# Altium PCB PCB2.PcbDoc (part 1 of 5)
Units mil, origin at the board's own origin, x right, y up, seen from the top; angles counter-clockwise.
Board outline 6000 x 4000 mil, 2 copper layers (Top Layer, Bottom Layer); 109 components, 117 nets, 490 pads, 96 vias.
Unrouted connection lines stored in the file: 3.
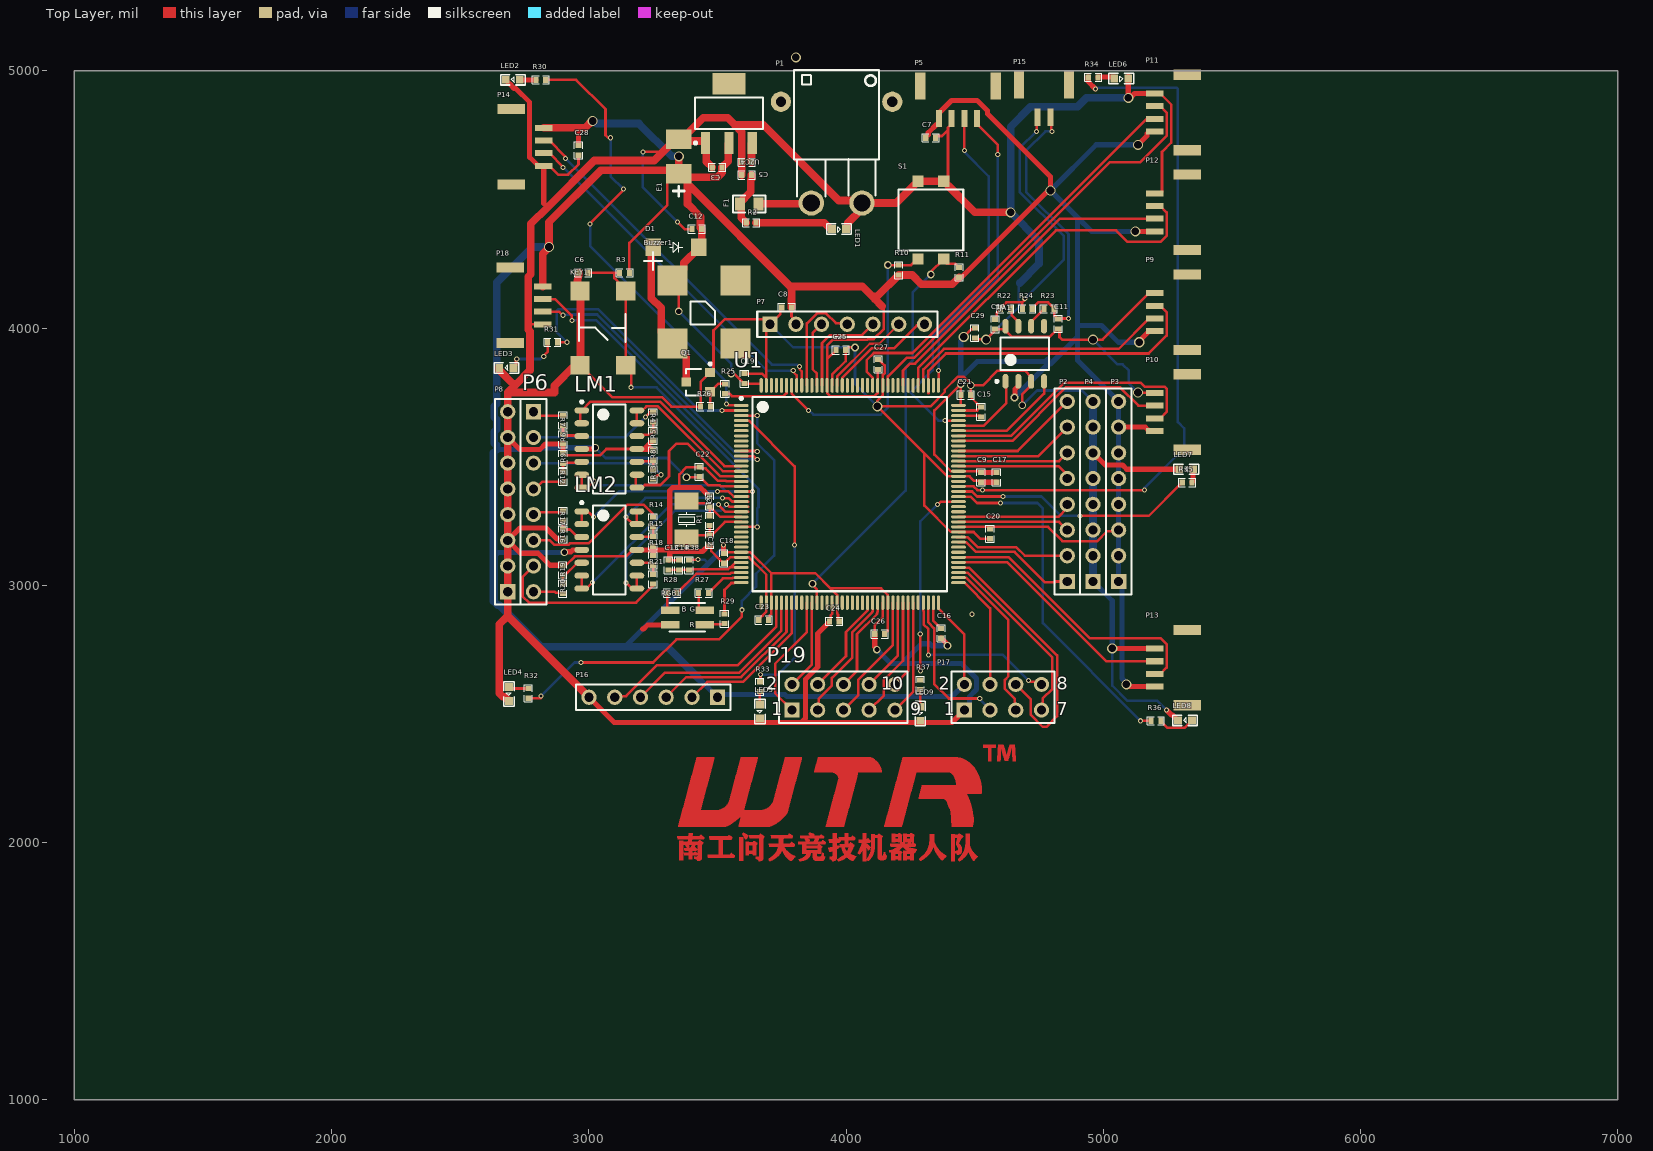
[diagram p0: Top Layer view]
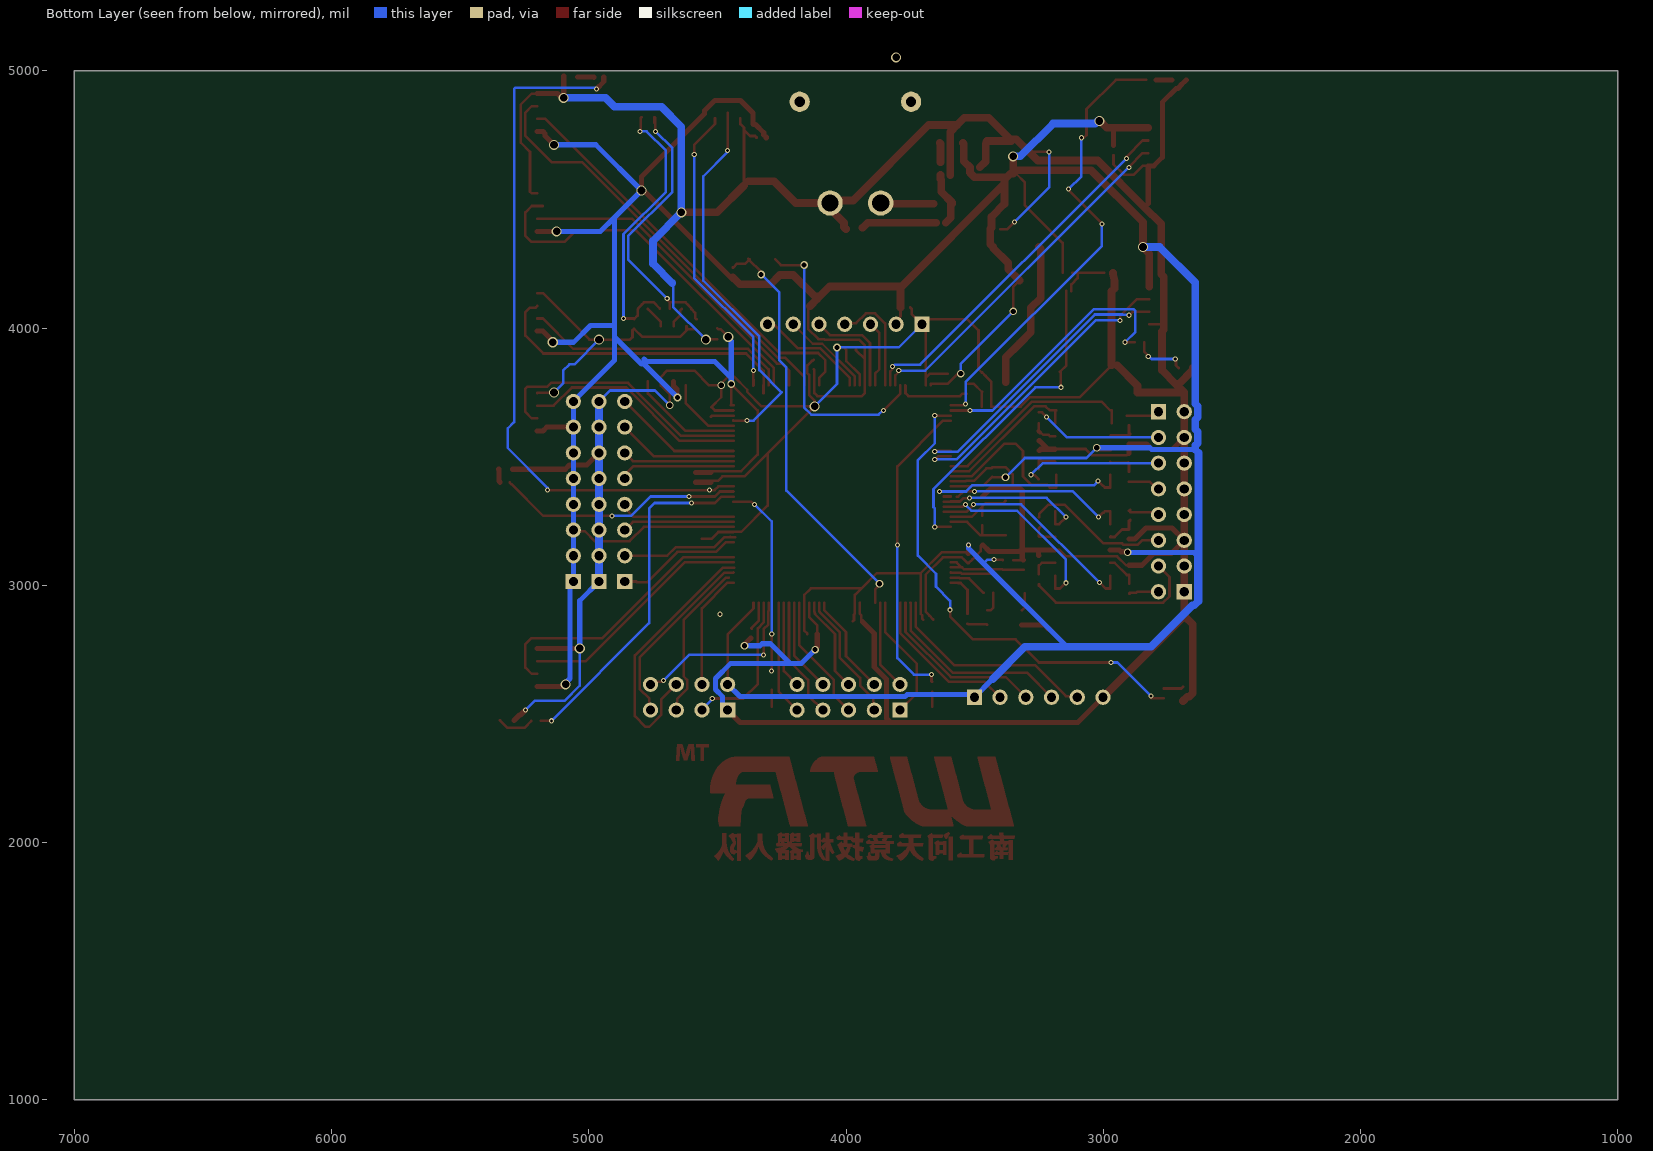
[diagram p1: Bottom Layer view, seen from below]

## Layer stack, top to bottom
Top Solder: solder mask 0.4, Solder Resist, Dk 3.5
Top Layer: signal copper 1.4
Dielectric 1: dielectric 12.6, FR-4, Dk 4.8
Bottom Layer: signal copper 1.4
Bottom Solder: solder mask 0.4, Solder Resist, Dk 3.5

## Board outline
1000,1000 7000,1000 7000,5000 1000,5000

## Design rules (kind name [scope] priority, off if disabled: settings)
Clearance [All] p1: gap=8 ignorepadtopadclearanceinfootprint=TRUE except(0: Arc-Hole Track-Hole SMDPad-Hole THPad-Hole Via-Hole Fill-Hole Poly-Hole Region-Hole Text-Hole)
ComponentClearance [All] p1: gap=0 collisioncheckmode=3 verticalgap=0 showdistances=FALSE
MinimumSolderMaskSliver [All] p1: minsoldermaskwidth=0
PolygonConnect [All] p1: connectstyle=Relief reliefconductorwidth=10 reliefentries=4 polygonreliefangle="90 Angle" airgapwidth=10
RoutingVias [All] p1: holewidth=11.81 width=19.68 viastyle="Through Hole" minholewidth=11.81 minwidth=11.81 maxholewidth=39.37 maxwidth=39.37
SilkToSilkClearance [All] p1: silktosilkclearance=0
SilkToSolderMaskClearance [IsPad] p1: minsilkscreentomaskgap=0 clearancetoexposedcopper=TRUE
SolderMaskExpansion [All] p1: expansion=4
Width [All] p1: maxlimit=100 minlimit=5 preferedwidth=10
26 further rules are at their usual default settings.

## Components (designator, comment, footprint, x,y, rotation, side; value= is the part's Value field where it differs from the comment)
Buzzer1 "Buzzer" BUZZER 3615.3,4230 r180 top
C1 "22PF" 0402 3470,3326.5 r90 top
C2 "22PF" 0402 3470,3176.5 r270 top
C3 "0.1uf" 0402 3499,4625 r180 top
C4 "0.1uf" 0402 3614,4645 r180 top
C5 "10uf" 0402 3614,4595 r180 top
C6 "1uf" 0402 2978,4215 r180 top
C7 "0.1uf" 0402 4329,4740 r180 top
C8 "0.1uf" 0402 3769,4080 r0 top
C9 "0.1uf" 0402 4525,3420 r270 top
C10 "30pf" 0402 4580,4015.4 r90 top
C11 "30pf" 0402 4825,4016.2 r90 top
C12 "10uf" 0402 3420,4385.06 r0 top
C13 "10uf" 0402 3310,3079 r270 top
C14 "104" 0402 3350,3079 r270 top
C15 "225" 0402 4525,3674 r270 top
C16 "225" 0402 4369.77,2813.28 r90 top
C17 "106" 0402 4585,3420 r90 top
C18 "104" 0402 3525,3105 r90 top
C19 "104" 0402 3605,3804 r270 top
C20 "104" 0402 4560,3200 r90 top
C21 "104" 0402 4466,3740 r180 top
C22 "104" 0402 3430,3440.9 r270 top
C23 "104" 0402 3680,2865.7 r0 top
C24 "104" 0402 3955,2860 r0 top
C25 "104" 0402 3980,3915.24 r180 top
C26 "104" 0402 4131,2810.58 r0 top
C27 "104" 0402 4125,3858.61 r270 top
C28 "104" 0402 2960,4691 r90 top
C29 "104" 0402 4500.89,3981 r90 top
D1 "DIODE" DIODE 3427.17,4315 r180 top
E1 "100uF/10V" 3528 3350,4600 r90 top
F1 "Fuse" 0805 3623.85,4483.15 r0 top
KEY1 "Key" 6*6*5轻触开关 3055,4000 r90 top
LED1 "green" 0603 3972.5,4385.06 r0 top
LED2 "red" 0603 2705,4965 r180 top
LED3 "red" 0603 2680,3845 r180 top
LED4 "red" 0603 2690,2578 r270 top
LED5 "red" 0603 3665.67,2510 r270 top
LED6 "green" 0603 5070,4970 r0 top
LED7 "green" 0603 5323,3451.06 r180 top
LED8 "green" 0603 5317.98,2475 r180 top
LED9 "green" 0603 4288.74,2501.48 r270 top
LM1 "LM324" LM324 3080,3530 r0 top
LM2 "LM324" LM324 3080,3137.81 r0 top
P1 "Header 2" XT30-PW-M 3963.46,4683.15 r0 top
P2 "Header 8" HDR1X8 4860,3015 r90 top
P3 "Header 8" HDR1X8 5060,3015 r90 top
P4 "Header 8" HDR1X8 4960,3015 r90 top
P5 "Header 4" GH1.25_4P 4435.39,4894.72 r180 top
P6 "Header 8" HDR1X8 2785,3675 r270 top
P7 "Header 7" HDR1X7 3705,4015 r0 top
P8 "Header 8" HDR1X8 2685,2975 r90 top
P9 "Header 4" GH1.25_4P 5279.72,4061.89 r90 top
P10 "Header 4" GH1.25_4P 5279.72,3673.82 r90 top
P11 "Header 4" GH1.25_4P 5279.72,4838.03 r90 top
P12 "Header 4" GH1.25_4P 5279.72,4449.96 r90 top
P13 "Header 4" GH1.25_4P 5279.72,2680.39 r90 top
P14 "Header 4" GH1.25_4P 2745.28,4704.61 r270 top
P15 "Header 2" GH1.25_2P 4867.05,5057.98 r180 top
P16 "Header 6" HDR1X6 3501,2565 r180 top
P17 "Header 4X2" HDR2X4 4460,2515 r0 top
P18 "Header 4" GH1.25_4P 2741.26,4088.35 r270 top
P19 "Header 5X2" HDR2X5 3790,2515 r0 top
Q1 "S8050" SOT-23R 3430,3790 r90 top
R1 "1M" 0402 3470.13,3251.5 r90 top
R2 "560R" 0402 3631,4410 r0 top
R3 "10K" 0402 3139,4215 r0 top
R4 "100K" 0402 3250,3654 r270 top
R5 "100K" 0402 3250,3581.06 r90 top
R6 "100K" 0402 2899.97,3568 r90 top
R7 "100K" 0402 2899.97,3641 r90 top
R8 "100K" 0402 3250,3504.87 r270 top
R9 "100K" 0402 2899.97,3493 r270 top
R10 "10K" 0402 4204.8,4225.64 r270 top
R11 "10K" 0402 4439.8,4216.64 r90 top
R12 "100K" 0402 2899.97,3421.9 r270 top
R13 "100K" 0402 3250,3432.06 r270 top
R14 "100K" 0402 3250,3246 r270 top
R15 "100K" 0402 3250,3171.16 r90 top
R16 "100K" 0402 2899.97,3199 r90 top
R17 "100K" 0402 2899.97,3270.19 r90 top
R18 "100K" 0402 3250,3097.16 r270 top
R19 "100K" 0402 2899.23,3059.16 r270 top
R20 "100K" 0402 2899.23,2987.35 r270 top
R21 "100K" 0402 3250,3024 r270 top
R22 "0R" 0402 4620,4075.2 r180 top
R23 "0R" 0402 4789,4075.2 r0 top
R24 "120R" 0402 4705,4075.2 r180 top
R25 "510R" 0402 3530,3764 r90 top
R26 "10K" 0402 3453.7,3695 r0 top
R27 "47R" 0402 3446.17,2970.55 r180 top
R28 "47R" 0402 3324,2970 r0 top
R29 "68R" 0402 3527.58,2870 r270 top
R30 "1K" 0402 2814,4965 r0 top
R31 "1K" 0402 2859,3945 r0 top
R32 "1K" 0402 2765,2580 r270 top
R33 "1K" 0402 3665,2606 r90 top
R34 "510R" 0402 4961,4975 r180 top
R35 "510R" 0402 5325.98,3400 r180 top
R36 "510R" 0402 5205,2473.5 r180 top
R37 "510R" 0402 4288.68,2613.62 r90 top
R38 "10R" 0402 3390,3079 r270 top
RGB1 "RGB" RGB_LED 3384.14,2875 r0 top
S1 "Switch" SWITCH_2P 4329.8,4420.11 r0 top
TJA1 "TJA1050" TJA1050 4695,3900.2 r90 top
U1 "STM32F407ZGT6" STM32F103ZETx 4015,3355 r0 top
U2 "AMS1117-3.3" ASM1117 3545,4835 r90 top
x1 "8MHz" 8M晶振 3380,3255.5 r270 top

## Footprints (in the part's own frame and the unit in brackets; to place one, negate y for a bottom-side part, rotate by r counter-clockwise, add the part's x,y. Pads: shape width x height; smd on the part's side, far side on the other; paste and mask are expansions set on the pad)
6*6*5轻触开关 [mm]
  rect 1.85x1.9 smd: 1(-3.675,2.25) 2(3.675,2.25) 3(-3.675,-2.25) 4(3.675,-2.25)
  silkscreen extent -1.35,-2.22 1.45,2.35
8M晶振 [mm]
  rect 1.7x2.4 smd: 1(-1.85,0) 2(1.85,0)
  silkscreen extent -0.72,-0.77 0.72,0.87, body extent -2.5,-1.6 2.5,1.6, height 0.25
0402 [mil]
  rect 20x23.62 smd: 1(-19,0) 2(19,0)
  silkscreen extent -33,-16 33,16
0603 [mil]
  rect 30x30 smd: 1(-27,0) 2(27.5,-0.06)
  silkscreen extent -48,-20 48,20
0805 [mil]
  rect 39.37x50 smd: 1(-36,0) 2(36,0)
  silkscreen extent -63,-33 64,33
3528 [mm]
  rect 1.9x2.5 smd: 1(0,0) 2(3.42,0)
  silkscreen extent -2.24,-0.56 -1.24,0.56
ASM1117 [mm] "SOT223, 4-Leads, Body 6.51x7.00mm (avg), Pitch 2.30mm, IPC Medium Density"
  rect 2.15x0.9 smd: 1(-2.93,2.3) 2(-2.93,0) 3(-2.93,-2.3)
  rect 2.15x3.25 smd: 4(2.93,0)
  silkscreen extent -3.05,-3.35 1.55,3.42, body extent -1.86,-3.35 1.86,3.35, height 1.8
BUZZER [mil]
  rect 118.11x118.11 smd: 1(290,45) 2(290,290) 3(45,290) 4(45,45)
  silkscreen extent 124,-65 400,216
DIODE [mm] "SODFL, 2-Leads, Body 3.63x5.35mm, IPC Medium Density"
  rect 1.52x1.724 smd: 1(0,0) 2(4.5,0)
  silkscreen extent 1.57,-0.5 2.86,0.52
GH1.25_2P [mm]
  rect 1x2.7 smd: 0(0,2.845) 0(4.95,2.845)
  rect 0.6x1.7 smd: 1(1.85,6.045) 2(3.1,6.045)
GH1.25_4P [mm]
  rect 1x2.7 smd: 0(-3.725,-1.175) 0(3.725,-1.175)
  rect 0.6x1.7 smd: 1(-1.875,2.025) 2(-0.625,2.025) 3(0.625,2.025) 4(1.875,2.025)
HDR1X6 [mm] "Connector; Header; 6 Position"
  rect 1.5x1.5 hole 0.9: 1(0,0)
  round 1.5 hole 0.9: 2(2.54,0) 3(5.08,0) 4(7.62,0) 5(10.16,0) 6(12.7,0)
  silkscreen extent -1.27,-1.27 13.97,1.27
HDR1X7 [mm] "Connector; Header; 7 Position"
  rect 1.5x1.5 hole 0.9: 1(0,0)
  round 1.5 hole 0.9: 2(2.54,0) 3(5.08,0) 4(7.62,0) 5(10.16,0) 6(12.7,0) 7(15.24,0)
  silkscreen extent -1.27,-1.27 16.51,1.27
HDR1X8 [mm] "Connector; Header; 8 Position"
  rect 1.5x1.5 hole 0.9: 1(0,0)
  round 1.5 hole 0.9: 2(2.54,0) 3(5.08,0) 4(7.62,0) 5(10.16,0) 6(12.7,0) 7(15.24,0) 8(17.78,0)
  silkscreen extent -1.27,-1.27 19.05,1.27
HDR2X4 [mm] "Connector; Header; 4x2 Position"
  rect 1.5x1.5 hole 0.9: 1(0,0)
  round 1.5 hole 0.9: 2(0,2.54) 3(2.54,0) 4(2.54,2.54) 5(5.08,0) 6(5.08,2.54) 7(7.62,0) 8(7.62,2.54)
  silkscreen extent -1.27,-1.27 8.89,3.81
HDR2X5 [mm] "Connector; Header; 5x2 Position"
  rect 1.5x1.5 hole 0.9: 1(0,0)
  round 1.5 hole 0.9: 2(0,2.54) 3(2.54,0) 4(2.54,2.54) 5(5.08,0) 6(5.08,2.54) 7(7.62,0) 8(7.62,2.54) 9(10.16,0) 10(10.16,2.54)
  silkscreen extent -1.27,-1.27 11.43,3.81
LM324 [mm] "SOIC, 14-Leads, Body 8.65x3.90mm, Pitch 1.27mm, IPC Medium Density"
  oval 1.45x0.6 smd: 1(-2.725,3.81) 2(-2.725,2.54) 3(-2.725,1.27) 4(-2.725,0) 5(-2.725,-1.27) 6(-2.725,-2.54) 7(-2.725,-3.81) 8(2.725,-3.81) 9(2.725,-2.54) 10(2.725,-1.27) 11(2.725,0) 12(2.725,1.27) 13(2.725,2.54) 14(2.725,3.81)
  silkscreen extent -2.85,-4.4 1.6,4.78, body extent -2,-4.4 2,4.4, height 1.75
RGB_LED [mm]
  rect 1.8x0.75 smd: 1(-1.7,-0.725) 2(-1.7,0.725) 3(1.7,-0.725) 4(1.7,0.725)
  silkscreen extent -1.8,-1.36 1.7,1.44
SOT-23R [mm] "SOT-23; 3 Leads; Body 3.0 x 2.5 mm, inc. leads (LxW max)"
  rect 0.9x0.95 smd: 1(0.95,-1.048) 2(-0.95,-1.048) 3(0,1.302)
  silkscreen extent -1.3,-1.19 1.93,1.3
STM32F103ZETx [mm] "TSQFP, 144-Leads, Body 20.00x20.00mm, Pitch 0.50mm, IPC Medium Density"
  oval 1.45x0.3 smd: 1(-10.725,8.75) 2(-10.725,8.25) 3(-10.725,7.75) 4(-10.725,7.25) 5(-10.725,6.75) 6(-10.725,6.25) 7(-10.725,5.75) 8(-10.725,5.25) 9(-10.725,4.75) 10(-10.725,4.25) 11(-10.725,3.75) 12(-10.725,3.25) 13(-10.725,2.75) 14(-10.725,2.25) 15(-10.725,1.75) 16(-10.725,1.25) 17(-10.725,0.75) 18(-10.725,0.25) 19(-10.725,-0.25) 20(-10.725,-0.75) 21(-10.725,-1.25) 22(-10.725,-1.75) 23(-10.725,-2.25) 24(-10.725,-2.75) 25(-10.725,-3.25) 26(-10.725,-3.75) 27(-10.725,-4.25) 28(-10.725,-4.75) 29(-10.725,-5.25) 30(-10.725,-5.75) 31(-10.725,-6.25) 32(-10.725,-6.75) 33(-10.725,-7.25) 34(-10.725,-7.75) 35(-10.725,-8.25) 36(-10.725,-8.75) 73(10.725,-8.75) 74(10.725,-8.25) 75(10.725,-7.75) 76(10.725,-7.25) 77(10.725,-6.75) 78(10.725,-6.25) 79(10.725,-5.75) 80(10.725,-5.25) 81(10.725,-4.75) 82(10.725,-4.25) 83(10.725,-3.75) 84(10.725,-3.25) 85(10.725,-2.75) 86(10.725,-2.25) 87(10.725,-1.75) 88(10.725,-1.25) 89(10.725,-0.75) 90(10.725,-0.25) 91(10.725,0.25) 92(10.725,0.75) 93(10.725,1.25) 94(10.725,1.75) 95(10.725,2.25) 96(10.725,2.75) 97(10.725,3.25) 98(10.725,3.75) 99(10.725,4.25) 100(10.725,4.75) 101(10.725,5.25) 102(10.725,5.75) 103(10.725,6.25) 104(10.725,6.75) 105(10.725,7.25) 106(10.725,7.75) 107(10.725,8.25) 108(10.725,8.75)
  oval 0.3x1.45 smd: 37(-8.75,-10.725) 38(-8.25,-10.725) 39(-7.75,-10.725) 40(-7.25,-10.725) 41(-6.75,-10.725) 42(-6.25,-10.725) 43(-5.75,-10.725) 44(-5.25,-10.725) 45(-4.75,-10.725) 46(-4.25,-10.725) 47(-3.75,-10.725) 48(-3.25,-10.725) 49(-2.75,-10.725) 50(-2.25,-10.725) 51(-1.75,-10.725) 52(-1.25,-10.725) 53(-0.75,-10.725) 54(-0.25,-10.725) 55(0.25,-10.725) 56(0.75,-10.725) 57(1.25,-10.725) 58(1.75,-10.725) 59(2.25,-10.725) 60(2.75,-10.725) 61(3.25,-10.725) 62(3.75,-10.725) 63(4.25,-10.725) 64(4.75,-10.725) 65(5.25,-10.725) 66(5.75,-10.725) 67(6.25,-10.725) 68(6.75,-10.725) 69(7.25,-10.725) 70(7.75,-10.725) 71(8.25,-10.725) 72(8.75,-10.725) 109(8.75,10.725) 110(8.25,10.725) 111(7.75,10.725) 112(7.25,10.725) 113(6.75,10.725) 114(6.25,10.725) 115(5.75,10.725) 116(5.25,10.725) 117(4.75,10.725) 118(4.25,10.725) 119(3.75,10.725) 120(3.25,10.725) 121(2.75,10.725) 122(2.25,10.725) 123(1.75,10.725) 124(1.25,10.725) 125(0.75,10.725) 126(0.25,10.725) 127(-0.25,10.725) 128(-0.75,10.725) 129(-1.25,10.725) 130(-1.75,10.725) 131(-2.25,10.725) 132(-2.75,10.725) 133(-3.25,10.725) 134(-3.75,10.725) 135(-4.25,10.725) 136(-4.75,10.725) 137(-5.25,10.725) 138(-5.75,10.725) 139(-6.25,10.725) 140(-6.75,10.725) 141(-7.25,10.725) 142(-7.75,10.725) 143(-8.25,10.725) 144(-8.75,10.725)
  silkscreen extent -10.85,-9.6 9.6,9.6, body extent -10,-10 10,10, height 1.6
SWITCH_2P [mm]
  rect 1.1x1.1 smd: 1(-1.27,3.835) 2(-1.27,-3.835) 3(1.27,3.835) 4(1.27,-3.835)
  silkscreen extent -3.2,-3.03 3.2,3.03
TJA1050 [mm] "SOIC, 8-Leads, Body 4.90x3.90mm, Pitch 1.27mm, IPC Medium Density"
  oval 1.45x0.6 smd: 1(-2.725,1.905) 2(-2.725,0.635) 3(-2.725,-0.635) 4(-2.725,-1.905) 5(2.725,-1.905) 6(2.725,-0.635) 7(2.725,0.635) 8(2.725,1.905)
  silkscreen extent -2.85,-2.4 1.6,2.88, body extent -2,-2.4 2,2.4, height 1.75
XT30-PW-M [mm]
  round 2 hole 1: 0(-5.5,5) 0(5.5,5)
  round 2.5 hole 1.7: 1(-2.5,-5) 2(2.5,-5)
  silkscreen extent -4.22,-4.34 4.19,8.13

## Part data
C1 C2 C3 C4 C5 C6 C7 C8 C9 C10 C11 C12 C13 C14 C15 C16 C17 C18 C19 C20 C21 C22 C23 C24 C25 C26 C27 C28 C29: library part C
E1: library part C-CM, "钽电容", BOM名称=贴片电解电容, 学习资源=www.ooocke.com, 版权归属=源创客
LED1 LED2 LED3 LED4 LED5 LED6 LED7 LED8 LED9: library part LED
P1 P15: "Header, 2-Pin", LatestRevisionDate=17-Jul-2002, LatestRevisionNote="Re-released for DXP Platform.", Publisher="Altium Limited"
P2 P3 P4 P6 P8: "Header, 8-Pin", LatestRevisionDate=17-Jul-2002, LatestRevisionNote="Re-released for DXP Platform.", Publisher="Altium Limited"
P5 P9 P10 P11 P12 P13 P14 P18: "Header, 4-Pin", LatestRevisionDate=17-Jul-2002, LatestRevisionNote="Re-released for DXP Platform.", Publisher="Altium Limited"
P7: "Header, 7-Pin", LatestRevisionDate=17-Jul-2002, LatestRevisionNote="Re-released for DXP Platform.", Publisher="Altium Limited"
P16: "Header, 6-Pin", LatestRevisionDate=17-Jul-2002, LatestRevisionNote="Re-released for DXP Platform.", Publisher="Altium Limited"
P17: "Header, 4-Pin, Dual row", LatestRevisionDate=17-Jul-2002, LatestRevisionNote="Re-released for DXP Platform.", Publisher="Altium Limited"
P19: "Header, 5-Pin, Dual row", LatestRevisionDate=17-Jul-2002, LatestRevisionNote="Re-released for DXP Platform.", Publisher="Altium Limited"
Q1: library part NPN, "8050/BCW846/BCW847"
R1 R2 R3 R4 R5 R6 R7 R8 R9 R10 R11 R12 R13 R14 R15 R16 R17 R18 R19 R20 R21 R22 R23 R24 R25 R26 R27 R28 R29 R30 R31 R32 R33 R34 R35 R36 R37 R38: library part R
x1: library part XTAL_8MHz

## Via types
v1: diameter 19.68, hole 11.81, Top Layer to Bottom Layer, tented both sides, 64 vias
v2: diameter 39, hole 30, Top Layer to Bottom Layer, tented both sides, 17 vias
v3: diameter 30, hole 20, Top Layer to Bottom Layer, tented both sides, 15 vias

## Nets (pads, with @x,y where several pads share a name; then routed paths per layer and width w, separated by ;. In a path a pad name is that pad's centre, name@x,y a point inside that pad or via, vN(x,y) a via of type N, cw(c..) or ccw(c..) an arc to the next point about the centre after c; other vN are vias at no path point)
ADC3_4: LM1.6 LM1.7 U1.18 | length 800.9
  Top Layer w10: LM1.6@2972.72,3430 LM1.7@2972.72,3381.14 ; LM1.7@2988.31,3381.14 LM1.7@2972.72,3381.14 ; v1(3020,3405) 3002.43,3387.43 3000.57,3387.43 2993.13,3380 LM1.7@2972.72,3380 LM1.7@2972.72,3381.14 ; U1.18@3592.76,3364.84 3592.83,3364.92 v1(3636.92,3364.92)
  Bottom Layer w10: v1(3020,3405) 3036.5,3388.5 3509.46,3388.5 3533.04,3364.92 v1(3636.92,3364.92)
ADC3_5: LM2.1 LM2.2 U1.19 | length 734.3
  Top Layer w10: LM2.2@2972.72,3237.81 LM2.1@2972.72,3287.81 2993.13,3287.81 2998.38,3282.57 3000.07,3282.57 v1(3017.63,3265) ; v1(3500,3365.66) 3542.42,3365.66 3563.7,3344.38 U1.19@3569.65,3344.38 ; U1.19@3592.76,3345.16 3592.76,3345.32 U1.19@3620,3345.32
  Bottom Layer w10: v1(3017.63,3265) 3118.3,3365.66 v1(3500,3365.66)
ADC3_6: LM2.13 LM2.14 U1.20 | length 616.1
  Top Layer w10: v1(3145,3265) 3145,3264.18 3171.37,3237.81 LM2.13@3187.28,3237.81 LM2.14@3187.28,3287.81 ; v1(3520,3340) 3521.85,3338.15 3544.47,3338.15 3556.8,3325.82 3592.41,3325.82 U1.20@3592.76,3325.47 ; U1.20@3592.76,3325.63 U1.20@3620,3325.63
  Bottom Layer w10: v1(3145,3265) 3220,3340 v1(3520,3340)
ADC3_7: LM2.8 LM2.9 U1.21 | length 761.2
  Top Layer w10: v1(3145,3010) 3146.68,3010 3168.87,2987.81 LM2.8@3187.28,2987.81 LM2.9@3187.28,3037.81 ; v1(3535,3315) 3537.62,3315 3546.83,3305.79 U1.21@3592.76,3305.79 U1.21@3592.41,3306.13 ; U1.21@3592.76,3305.94 U1.21@3620,3305.94
  Bottom Layer w10: v1(3145,3010) 3145,3100 3335,3290 3512.3,3290 3535,3312.7 v1(3535,3315)
ADC3_8: LM2.6 LM2.7 U1.22 | length 846.8
  Top Layer w10: LM2.6@2972.72,3037.81 LM2.7@2972.72,2987.81 2990.87,2987.81 3013.57,3010.51 v1(3015,3010.51) ; v1(3505,3315) 3505,3312.38 3531.62,3285.76 3592.41,3285.76 U1.22@3592.76,3286.1 3592.76,3286.26 U1.22@3620,3286.26
  Bottom Layer w10: v1(3015,3010.51) 3319.49,3315 v1(3505,3315)
ADC3_9: LM1.1 LM1.2 U1.13 | length 824.7
  Top Layer w10: LM1.2@2967.72,3630 2967.72,3680 LM1.1@2972.72,3680 3006.72,3714 3276.85,3714 3527.58,3463.27 3561.16,3463.27 U1.13@3592.76,3463.27 3592.41,3463.61 3561.16,3463.61
ADC3_14: LM1.13 LM1.14 U1.14 | length 573.7
  Top Layer w10: LM1.13@3187.28,3630 3187.28,3675 3182.28,3680 LM1.14@3187.28,3680 3207.7,3680 3223.7,3696 3269,3696 3521.42,3443.58 U1.14@3592.76,3443.58
ADC3_15: LM1.8 LM1.9 U1.15 | length 641.2
  Top Layer w10: LM1.9@3182.28,3430 3182.28,3380 LM1.8@3187.28,3380 3207.7,3380 3217.7,3390 3278,3390 3311.9,3423.9 3311.9,3521.9 3340.86,3550.86 3384.14,3550.86 3462.1,3472.9 3510.5,3424.5 3539.76,3424.5 3540.37,3423.9 U1.15@3592.76,3423.9
ADC_CH1: P6.1 R7.2 | length 129.2
  Top Layer w10: P6.1@2785,3675 2800,3660 R7.2@2899.97,3660 R7.2@2908,3660
ADC_CH2: P6.2 R4.1 | length 507.4
  Top Layer w10: v1(3220,3655) 3237.57,3672.57 3249.57,3672.57 R4.1@3250,3673 ; R4.1@3245.03,3673 R4.1@3246.84,3673
  Bottom Layer w10: P6.2@2785,3575 3140,3575 v1(3220,3655)
ADC_CH3: P6.3 R13.2 | length 550.7
  Top Layer w10: R13.2@3250,3413.06 3251.81,3413.06 3266.89,3428.15 3278.15,3428.15 v1(3280,3430)
  Bottom Layer w10: P6.3@2785,3475 3235,3475 v1(3280,3430)
ADC_CH4: P6.4 R12.2 | length 126.5
  Top Layer w10: P6.4@2785,3375 2792.18,3375 2820.07,3402.9 R12.2@2899.97,3402.9
ADC_CH5: P6.5 R17.2 | length 129.7
  Top Layer w10: P6.5@2785,3275 2794.19,3284.19 2894.97,3284.19 R17.2@2899.97,3289.19 R17.2@2894.97,3294.19 ; R17.2@2895,3289.19 R17.2@2896.81,3289.19
ADC_CH6: P6.6 R14.1 | length 564.7
  Top Layer w10: P6.6@2785,3175 2848.72,3175 2866.72,3157 2920.78,3157 2926.78,3163 2999.73,3163 3149.35,3312.62 3214.29,3312.62 3248.19,3278.73 3248.19,3265 R14.1@3250,3265
ADC_CH7: P6.7 R21.2 | length 694.3
  Top Layer w10: P6.7@2785,3075 2742.47,3032.47 2742.47,2957.38 2767.38,2932.47 3183.77,2932.47 3250,2998.71 R21.2@3250,3001.38 ; R21.2@3248.19,3000 3249.57,3001.38 R21.2@3250,3001.38 ; R21.2@3250,3001.38 3248.19,3003.19 R21.2@3250,3005 R21.2@3250,3001.38
ADC_CH8: P6.8 R20.2 | length 118.8
  Top Layer w10: P6.8@2785,2975 2867.97,2975 2872.42,2970.55 2897.04,2970.55 R20.2@2899.23,2968.35 R20.2@2897.42,2968.35
BOOT0: R10.1 S1.2 U1.138 | length 1125.9
  Top Layer w10: U1.138@3788.62,3777.24 3788.97,3776.9 3788.97,3746.03 v1(3855,3680) ; v3(4162.64,4245) 4252.85,4245 S1.2@4274.8,4266.96
  Bottom Layer w10: v1(3855,3680) 3857.13,3680 3873.63,3663.5 4135.12,3663.5 4162.47,3690.85 4162.47,4244.83 v3(4162.64,4245)
BOOT1: R11.2 S1.4 U1.48 | length 1633.9
  Top Layer w10: v3(3870,3006.35) 3870,3000.93 3887.05,2983.89 U1.48@3887.05,2932.76 ; v3(4330,4208.65) 4330,4219.32 S1.4@4376.22,4265.54 ; S1.4@4374.8,4266.96 S1.4@4376.22,4265.54 ; S1.4@4379.8,4269.12 S1.4@4376.22,4265.54 ; R11.2@4439.8,4235.64 4437.99,4235.64 4423.33,4250.3 4391.46,4250.3 S1.4@4376.22,4265.54
  Bottom Layer w10: v3(3870,3006.35) 4232,3368.35 4232,3847.46 4260,3875.46 4260,4140 v3@4330,4210
Buzzer: R25.1 U1.139 | length 277.4
  Top Layer w10: R25.1@3530,3745 3546.83,3745 3556.13,3735.7 3757.08,3735.7 3768.59,3747.21 3768.59,3776.9 U1.139@3768.94,3777.24
CAN_RX: TJA1.4 U1.103 | length 440.1
  Top Layer w10: U1.103@4437.24,3601.06 4625.66,3601.06 4770,3745.4 TJA1.4@4770,3792.92
CAN_TX: TJA1.1 U1.104 | length 291.9
  Top Layer w10: U1.104@4437.24,3620.75 4437.59,3621.09 4536.09,3621.09 4623.62,3708.62 TJA1.1@4623.62,3777.72
CANH: C10.2 P15.2 R22.2 R24.2 | length 1080.3
  Top Layer w10: C10.2@4580,4034.4 4581.81,4034.4 4586.81,4039.4 4586.81,4059.2 4601,4073.39 R22.2@4601,4075.2 4601,4077.01 4613.71,4089.72 4613.71,4090.1 4623.62,4100.01 4684.99,4100.01 ; R24.2@4686,4075.2 4684.99,4076.21 4684.99,4100.01 ; v1(4695,4115) 4695,4110.02 4684.99,4100.01 ; v1(4740,4765) 4741.85,4766.85 4741.85,4816.85 P15.2@4745,4820 P15.2@4745,4798.35
  Bottom Layer w10: v1(4695,4115) 4847,4267 4847,4357.54 4675,4529.54 4675,4700 v1(4740,4765)
CANL: C11.2 P15.1 R23.2 R24.1 | length 1105.4
  Top Layer w10: R24.1@4724,4075.2 4724,4077.01 4747,4100.01 4785.38,4100.01 4793,4092.4 4793,4092.01 4808,4077.01 R23.2@4808,4075.2 4810,4073.2 4810,4048.39 4823.19,4035.2 4825.27,4037.28 v1(4865,4037.28) ; P15.1@4794.21,4820 4798.15,4816.07 4798.15,4766.85 v1(4800,4765)
  Bottom Layer w10: v1(4800,4765) 4775,4765 4700,4690 4700,4530 4865,4365 v1(4865,4037.28)
CE: P17.3 U1.70 | length 586.7
  Top Layer w10: U1.70@4320.12,2932.76 4320.12,2855.8 4342.96,2832.96 4342.96,2617.04 4400,2560 v1(4520,2560)
  Bottom Layer w10: v1@4518.75,2558.75 4560,2517.5 P17.3@4560,2515
CS: P7.7 U1.128 | length 435.4
  Top Layer w10: U1.128@3985.47,3777.24 3985.82,3777.59 3985.82,3807.28 4099.74,3921.2 4186.2,3921.2 4275.33,4010.33 4300.33,4010.33 P7.7@4305,4015
CSN: P17.4 U1.73 | length 459.6
  Top Layer w10: U1.73@4437.24,3010.51 4459.88,3010.51 4560,2910.39 P17.4@4560,2615
DC: P7.6 U1.129 | length 358.5
  Top Layer w10: U1.129@3965.79,3777.24 3966.13,3777.59 3966.13,3813.05 4092.28,3939.2 4129.2,3939.2 P7.6@4205,4015
EXIT_0: P19.1 U1.46 | length 495.5
  Top Layer w10: P19.1@3790,2515 3725,2580 3725,2695.98 3847.68,2818.65 U1.46@3847.68,2932.76
EXIT_1: P19.2 U1.47 | length 349.8
  Top Layer w10: P19.2@3790,2615 3867.36,2692.36 U1.47@3867.36,2932.76
EXIT_7: P19.4 U1.58 | length 398.1
  Top Layer w10: P19.4@3890,2615 4000,2725 4000,2818.65 4083.9,2902.55 U1.58@4083.9,2932.76
EXIT_8: P19.3 U1.59 | length 506.2
  Top Layer w10: P19.3@3890,2515 3894.67,2519.67 3894.67,2559.53 3945,2609.86 3945,2640 4024.84,2719.84 4024.84,2818.04 4101.9,2895.09 4101.9,2897.06 4103.58,2898.74 U1.59@4103.58,2932.76
EXIT_9: P19.6 U1.60 | length 373.4
  Top Layer w10: P19.6@3990,2615 4042.84,2667.84 4042.84,2810.58 4119.9,2887.64 4119.9,2889.6 4121.58,2891.28 4121.58,2894.86 4123.27,2896.54 U1.60@4123.27,2932.76 U1.60@4122.92,2932.41
EXIT_10: P19.5 U1.63 | length 497.4
  Top Layer w10: P19.5@3990,2515 4047.47,2572.47 4047.47,2632.62 4182.32,2767.47 U1.63@4182.32,2932.76
EXIT_11: P19.8 U1.64 | length 364.2
  Top Layer w10: P19.8@4090,2615 4202.01,2727.01 U1.64@4202.01,2932.76
EXIT_12: P19.7 U1.65 | length 472.3
  Top Layer w10: P19.7@4090,2515 4147.47,2572.47 4147.47,2632.62 4221.69,2706.84 U1.65@4221.69,2932.76
EXIT_13: P19.10 U1.66 | length 339
  Top Layer w10: P19.10@4190,2615 4241.38,2666.38 U1.66@4241.38,2932.76
EXIT_14: P19.9 U1.67 | length 447.2
  Top Layer w10: P19.9@4190,2515 4261.06,2586.06 U1.67@4261.06,2932.76
GLED_1: R34.2 U1.92 | length 2743.6
  Top Layer w10: U1.92@4437.24,3384.53 4496.13,3384.53 4510.66,3370 v1(4530,3370) v1(5160,3370)
  Top Layer w20: R34.2@4942,4975 4942,4958 v1(4970,4930)
  Bottom Layer w10: v1(4970,4930) 4975,4935 5284.14,4935 5290,4929.14 5290,3635 5315,3610 5315,3534.24 5160,3379.24 v1(5160,3370)
GLED_2: R35.2 U1.91 | length 963.9
  Top Layer w10: U1.91@4437.24,3364.84 4490.36,3364.84 4509.7,3345.5 v1(4610,3345.5) ; v1(4910,3270) 5176.98,3270 5300.17,3393.19 5301.98,3393.19 5306.98,3398.19 R35.2@5306.98,3400
  Bottom Layer w10: v1(4610,3345.5) 4759.5,3345.5 4835,3270 v1(4910,3270)
GLED_3: R36.2 U1.90 | length 1370.9
  Top Layer w10: U1.90@4437.24,3345.16 4484.59,3345.16 4509.75,3320 v1(4601,3320) ; v1(5145,2473.5) R36.2@5186,2473.5
  Bottom Layer w10: v1(4601,3320) 4744.14,3320 4765,3299.14 4765,2853.5 v1(5145,2473.5)
GLED_4: R37.2 U1.89 | length 762
  Top Layer w10: v1@4288.68,2667.7 v1(4288.68,2810.58) ; v1(4355,3313.5) 4357.62,3313.5 4369.59,3325.47 U1.89@4437.24,3325.47
  Bottom Layer w10: v1(4288.68,2810.58) 4288.68,3248.68 v1@4355,3315
  other v1: 4290,2666.38
GND: C1.2 C2.2 C3.2 C4.2 C5.2 C6.2 C7.1 C8.1 C9.2 C10.1 C11.1 C12.1 C13.1 C14.1 C15.1 C16.1 C17.1 C18.1 C19.1 C20.1 C21.1 C22.1 C23.1 C24.1 C25.1 C26.1 C27.1 C28.1 C29.1 E1.2 KEY1.1 KEY1.2 LED1.2 LED2.2 LED3.2 LED4.2 LED5.2 LED6.2 LED7.2 LED8.2 LED9.2 LM1.11 LM2.11 P1.2 P4.1 P4.2 P4.3 P4.4 P4.5 P4.6 P4.7 P4.8 P5.3 P7.1 P8.1 P8.2 P8.3 P8.4 P8.5 P8.6 P8.7 P8.8 P9.4 P10.4 P11.4 P12.4 P13.4 P14.4 P16.6 P17.1 P18.4 Q1.1 R5.1 R6.1 R8.1 R9.1 R15.1 R16.1 R18.1 R19.1 R26.1 S1.1 S1.3 TJA1.3 TJA1.8 U1.16 U1.31 U1.38 U1.51 U1.61 U1.83 U1.94 U1.107 U1.120 U1.130 U1.143 U2.1 | length 24095.7
  Top Layer w10: 2764.52,4020 2769.99,4014.53 P18.4@2820.98,4014.53 ; P14.4@2825,4630.79 2846.65,4630.79 2880.83,4596.61 2920,4596.61 2960,4636.61 C28.1@2960,4672 ; R19.1@2899.23,3078.16 2911.24,3078.16 2945.71,3112.62 3145.36,3112.62 3170.55,3137.81 LM2.11@3187.28,3137.81 ; R9.1@2899.97,3512 2901.78,3512 2908.59,3505.19 3043.88,3505.19 3068.69,3530 LM1.11@3187.28,3530 ; KEY1.1@2966.42,3855.32 2967.4,3855.32 3090.72,3732 3284.31,3732 3321.31,3695 R26.1@3434.7,3695 3434.7,3790.84 3457.56,3813.7 3457.56,3814.69 3470.28,3827.4 Q1.1@3471.26,3827.4 3472.24,3827.4 3484.96,3840.12 3484.96,3991.16 3528.81,4035 3685,4035 P7.1@3705,4015 ; v1(3210,4685) 3280,4685 3284.27,4680.73 ; C13.1@3311.81,3098 C14.1@3350,3098 ; v1(3345,4412.51) 3372.44,4385.06 C12.1@3401,4385.06 ; 3355,3379.8 3352,3382.8 3352,3431.6 3380.3,3459.9 C22.1@3430,3459.9 3435,3454.9 3454.65,3454.9 3503.04,3406.5 3532.3,3406.5 3534.59,3404.21 U1.16@3592.76,3404.21 ; C2.2@3470,3157.5 3471.3,3157.5 3476.3,3152.5 3476.3,3132.5 3507.8,3101 3508.19,3101 3523.19,3086 C18.1@3525,3086 3526.81,3086 3541.81,3101 3542.2,3101 3549.79,3108.59 3592.41,3108.59 U1.31@3592.76,3108.94 3593.1,3108.59 3622.79,3108.59 3690.2,3041.19 3690.2,2935.78 3689.85,2935.43 3689.85,2896.75 3676,2882.9 3676,2882.51 3661,2867.51 C23.1@3661,2865.7 ; C19.1@3605,3823 3674.13,3823 3689.85,3807.28 3689.85,3777.59 U1.143@3690.2,3777.24 3690.2,3807.28 3690.2,4000.2 P7.1@3705,4015 ; C8.1@3750,4080 3745,4075 3745,4055 P7.1@3705,4015 ; C24.1@3936,2860 3941,2865 3941,2884.53 3945.76,2889.28 3945.76,2932.41 U1.51@3946.1,2932.76 ; U1.130@3946.1,3777.24 3946.45,3777.59 3946.45,3818.82 3999,3871.37 C25.1@3999,3915.24 4008.76,3925 v3(4035,3925) ; C26.1@4112,2810.58 4112,2845.53 4142.95,2876.49 U1.61@4142.95,2932.76 ; C27.1@4125,3877.61 4130,3872.61 4132.2,3872.61 4149.81,3855 4149.81,3824.23 4143.3,3817.71 4143.3,3777.59 U1.120@4142.95,3777.24 4142.61,3776.9 4142.61,3738.84 4121.66,3717.89 v2(4121.66,3696) ; C7.1@4348,4740 4348,4741.78 4353,4746.78 4373,4746.78 4396.46,4770.24 ; S1.3@4379.8,4571.09 4396.46,4554.44 4396.46,4770.24 ; P5.3@4410.79,4815 4410.79,4793.35 4396.46,4779.02 4396.46,4770.24 ; U1.107@4437.24,3679.8 4509.99,3679.8 4523.19,3693 4485,3731.19 C21.1@4485,3740 v3(4485,3777.59) ; C29.1@4500.89,3957 4501.89,3956 4544,3956 v2(4545,3955) 4585.75,3995.75 4613.71,3995.75 TJA1.8@4620,4002.04 ; C9.2@4525,3401 4520,3406 4498.27,3406 4480.72,3423.55 4437.59,3423.55 U1.94@4437.24,3423.9 4437.18,3423.96 4393.7,3423.96 4305,3512.66 ; C20.1@4560,3181 4522.46,3181 4496.1,3207.36 U1.83@4437.24,3207.36 4436.9,3207.71 4407.21,3207.71 4305,3309.92 4305,3512.66 ; TJA1.8@4620,4007.48 TJA1.8@4620,4002.04 ; v3(4685,3700) 4685,3741.18 4720,3776.18 TJA1.3@4720,3792.92 4720,3809.65 4695.19,3834.46 4589.46,3834.46 4532.59,3777.59 v3(4485,3777.59) ; v2(5097.5,4895) v2@5105,4895 ; v2(5135,3750) 5136.18,3748.82 5198.82,3748.82 P10.4@5200,3747.64 ; P9.4@5200,4135.71 5178.35,4135.71 4997.64,3955 v2(4960,3955) 4840,3955 4830,3965 4830,3992.2 C11.1@4825,3997.2 4823.19,3997.2 4791.93,3965.94 4644.81,3965.94 4620,3990.75 TJA1.8@4620,4002.04 ; P12.4@5200,4523.78 5221.65,4523.78 5228.46,4530.59 5228.46,4685.08 5264.46,4721.08 5264.46,4869.04 5221.65,4911.85 P11.4@5200,4911.85 ; v2(4121.66,3696) 4305,3512.66 ; v2(4121.66,3696) 4327.62,3696 4383.87,3752.25 4383.87,3760.3 4434.57,3811 4457.76,3811 4481.17,3787.59 4481.17,3781.42 v3(4485,3777.59)
  Top Layer w20: LED2.2@2677.5,4965.06 2696.64,4945.92 2696.64,4944.9 2709.54,4932 2716.57,4932 2770.17,4878.4 2770.17,4663.97 2803.35,4630.79 P14.4@2825,4630.79 2825,4485.1 2840,4470.1 ; P8.7@2685,3575 2732.53,3527.47 2809.86,3527.47 2831.39,3549 R6.1@2899.97,3549 R9.1@2899.97,3512 ; R19.1@2899.23,3078.16 2849.06,3078.16 2802.21,3125 2735,3125 P8.3@2685,3175 2732.53,3222.53 2833.72,3222.53 2876.25,3180 R16.1@2899.97,3180 ; P16.6@3001,2565 3098.53,2467.47 3664.46,2467.47 3827.47,2467.47 ; LM2.11@3187.28,3137.81 3255,3137.81 ; LM1.11@3187.28,3530 3187.98,3529.31 3216.82,3529.31 3242.76,3529.31 3248.19,3523.87 R8.1@3250,3523.87 ; 3216.82,3530.69 3248.19,3562.06 R5.1@3250,3562.06 ; R18.1@3250,3116.16 3251.81,3116.16 3251.81,3134.62 3255,3137.81 ; C13.1@3310,3098 3311.81,3098 3311.81,3099.81 3314.76,3102.76 3314.76,3141.75 ; C2.2@3470,3157.5 3468.19,3157.5 3441.89,3131.2 3325.3,3131.2 3314.76,3141.75 ; C1.2@3470,3345.5 3468.19,3345.5 3448.84,3364.85 3448.84,3365.66 3434.7,3379.8 3355,3379.8 3325.3,3379.8 3314.76,3369.26 3314.76,3141.75 ; C24.1@3936,2860 3936,2858.19 3890.36,2812.55 3890.36,2682.58 3842.47,2634.69 3842.47,2482.47 3827.47,2467.47 ; C26.1@4112,2810.58 4112,2760.71 4120,2752.71 v3(4120,2750) ; C16.1@4369.77,2794.28 4371.58,2794.28 4392.85,2773 4392.85,2766.91 v3(4394.77,2765) ; P17.1@4460,2515 4412.19,2467.19 4372.81,2467.19 4372.53,2467.47 4288.68,2467.47 3827.47,2467.47 ; C9.2@4525,3401 C17.1@4585,3401 ; P4.6@4960,3515 5007.53,3467.47 5074.74,3467.47 5091.09,3451.13 LED7.2@5295.5,3451.13 ; v2@5035,2754.21 P13.4@5200,2754.21 ; v2(5097.5,4895) LED6.2@5097.5,4969.94 LED6.2@5097.5,4979.94 ; v2@5105,4895 5121.85,4911.85 P11.4@5200,4911.85 ; v1(5246.46,2515) 5265.38,2496.06 5269.49,2496.06 LED8.2@5290.48,2475.06 ; 3255,3137.81 3310.82,3137.81 3314.76,3141.75
  Top Layer w30: LED3.2@2652.5,3845.06 2652.5,3836.97 2706.97,3782.5 2717.5,3782.5 ; LED4.2@2689.94,2550.5 2673.44,2567 2665.47,2567 2652,2580.47 2652,2848 2685,2881 ; KEY1.1@2945.73,3855 2866.85,3776.12 2866.85,3750 2685,3750 ; KEY1.2@2955.98,4153.64 2955.98,4181.56 C6.2@2962.34,4214.35 ; KEY1.1@2966.42,3855.32 2967.84,3856.74 2967.84,4143.26 KEY1.2@2966.42,4144.69 ; P16.6@3001,2565 2685,2881 ; C3.2@3480,4625 3457.17,4647.83 3457.17,4716.93 U2.1@3454.45,4719.65 3454.45,4724.43 3451.73,4727.15 3357.5,4727.15 E1.2@3350,4734.65 ; C5.2@3595,4595 C4.2@3595,4645 3594.83,4645.17 3594.83,4762.38 3567.21,4790 ; LED1.2@4000,4385 4007.91,4392.91 4007.91,4409.11 4063.43,4464.63 P1.2@4063.43,4483.15 ; P1.2@4060.28,4486.3 4050.33,4496.24 3971.82,4496.24 3678.06,4790 3567.21,4790 ; P1.2@4073.5,4486.3 4195.01,4486.3 S1.1@4279.8,4571.09 S1.3@4379.8,4571.09 ; S1.3@4396.46,4554.44 4500.89,4450 v2(4640,4450) ; 2685,2881 P8.1@2685,2975 P8.2@2685,3075 P8.3@2685,3175 P8.4@2685,3275 P8.5@2685,3375 P8.6@2685,3475 P8.7@2685,3575 P8.8@2685,3675 2685,3750 ; 2685,3750 2717.5,3782.5 ; 2717.5,3782.5 2771.15,3836.15 2771.15,3986.56 2764.52,3993.19 2764.52,4020 2764.52,4199.16 2774.93,4209.56 2774.93,4405.03 2840,4470.1 3021.32,4651.43 3254.97,4651.43 3284.27,4680.73 3338.19,4734.65 E1.2@3350,4734.65 ; E1.2@3350,4734.65 3361.81,4734.65 3444.74,4817.57 3539.64,4817.57 3567.21,4790
  Bottom Layer w10: v1(3210,4685) 3210,4547.51 v1(3345,4412.51) ; P7.1@3705,4015 3795,3925 v3(4035,3925) 4035,3782.66 v2(4121.66,3696) ; v2(4545,3955) 4672.16,4082.16 4672.16,4172.16 4675,4175 ; v3(4685,3700) 4742.53,3757.53 4917.47,3757.53 P4.8@4960,3715 ; v2(4960,3955) 5055.6,3859.4 5075.6,3859.4 5100,3835 5100,3785 v2(5135,3750) ; v2(5035,2755) 5035,2610 5094.07,2550.93 5210.54,2550.93 v1(5246.46,2515)
  Bottom Layer w20: v3(4120,2750) 4173.28,2696.72 4220,2696.72 ; 4375,2765 4334.38,2765 4326.53,2772.84 4293.47,2772.84 4220,2699.38 4220,2696.72 ; P17.1@4460,2515 4479.53,2534.53 4479.53,2567.31 4507.53,2595.31 4507.53,2637.47 4448.28,2696.72 4220,2696.72 ; P4.1@4960,3015 5035,2940 v2(5035,2755)
  Bottom Layer w30: 4675,4175 4750,4250 4750,4340 v2(4640,4450) 4640,4782.84 4717.16,4860 4900,4860 4935,4895 v2(5097.5,4895) ; P4.1@4960,3015 P4.2@4960,3115 P4.3@4960,3215 P4.4@4960,3315 P4.5@4960,3415 P4.6@4960,3515 P4.7@4960,3615 P4.8@4960,3715
I2C1_SCL: P14.2 U1.136 | length 1438.7
  Top Layer w10: P14.2@2825,4729.21 2846.65,4729.21 2908.15,4667.72 2908.15,4661.85 v1(2910,4660) ; v1(3820,3850) 3820,3840 3827.99,3832.01 U1.136@3827.99,3777.24
  Bottom Layer w10: v1(2910,4660) 3712.16,3857.84 3809.54,3857.84 3817.38,3850 v1(3820,3850)
I2C1_SDA: P14.3 U1.137 | length 1384.2
  Top Layer w10: P14.3@2825,4680 2846.65,4680 2900,4626.65 v1(2900,4625) ; v1(3795,3835) 3795,3830 3808.31,3816.69 U1.137@3808.31,3777.24
  Bottom Layer w10: v1(2900,4625) 2901.85,4625 3691.85,3835 v1(3795,3835)
I2C2_SCL: P18.2 U1.11 | length 1169.7
  Top Layer w10: P18.2@2820.98,4112.95 2821.08,4112.86 2869.45,4112.86 2933.15,4049.16 2933.15,4031.85 v1(2935,4030) ; U1.11@3592.76,3502.64 3639.74,3502.64 3652.38,3490 v1(3655,3490)
  Bottom Layer w10: v1(2935,4030) 3029.6,4030 3569.6,3490 v1(3655,3490)
I2C2_SDA: P18.3 U1.10 | length 1124.8
  Top Layer w10: P18.3@2820.98,4063.74 2883.64,4063.74 2897.38,4050 v1(2900,4050) ; U1.10@3592.76,3522.32 3650.06,3522.32 3652.38,3520 v1(3655,3520)
  Bottom Layer w10: v1(2900,4050) 2901.85,4051.85 2924.55,4051.85 2925.54,4052.84 3032.22,4052.84 3565.06,3520 v1(3655,3520)
IRQ: P17.8 U1.69 | length 699.1
  Top Layer w10: U1.69@4300.43,2932.76 4299.65,2932.01 4299.65,2902.29 4302.12,2899.82 4302.12,2848.35 4320.12,2830.35 v1(4320.12,2730) ; v1(4710,2630) 4712.62,2630 4718.23,2624.39 4750.61,2624.39 P17.8@4760,2615
  Bottom Layer w10: v1(4320.12,2730) 4610,2730 v1(4710,2630)
NetBuzzer1_2: Buzzer1.2 D1.2 Q1.3 | length 583.9
  Top Layer w30: D1.2@3250,4315 3243.24,4308.24 3243.24,4116.42 3281.24,4078.42 3281.24,3984.06 Buzzer1.2@3325.3,3940 3378.74,3886.56 Q1.3@3378.74,3790
NetC4_1: C4.1 C5.1 F1.1 R2.1 U2.3 | length 289.4
  Top Layer w30: R2.1@3612,4410 3592.54,4429.46 3592.54,4478.46 F1.1@3587.85,4483.15 3587.85,4488.46 3630,4530.61 3630,4576.26 3633,4579.26 C5.1@3633,4595 ; C4.1@3633,4645 3633,4717.09 U2.3@3635.55,4719.65
NetC15_2: C15.2 U1.106 | length 89.9
  Top Layer w10: U1.106@4437.24,3660.12 4437.59,3659.77 4520.23,3659.77 C15.2@4525,3655
NetC16_2: C16.2 U1.71 | length 112.6
  Top Layer w10: U1.71@4339.8,2932.76 4339.8,2861.57 4367.96,2833.42 C16.2@4366.81,2832.28
NetLED1_1: LED1.1 R2.2 | length 293.8
  Top Layer w30: R2.2@3650,4410 3915.56,4410 LED1.1@3935.5,4390.06
NetLED2_1: LED2.1 R30.1 | length 63
  Top Layer w20: LED2.1@2732,4965 R30.1@2795,4965
NetLED3_1: LED3.1 R31.1 | length 210.7
  Top Layer w10: LED3.1@2707,3845 2717,3855 2717,3874.38 2720,3877.38 v1(2720,3880) ; v1(2825,3890) 2825,3892.62 2840,3907.62 R31.1@2840,3945
  Bottom Layer w10: v1(2720,3880) 2812.38,3880 2822.38,3890 v1(2825,3890)
NetLED4_1: LED4.1 R32.1 | length 77.5
  Top Layer w10: LED4.1@2690,2605 2696,2599 R32.1@2765,2599
NetLED5_1: LED5.1 R33.1 | length 59.2
  Top Layer w10: LED5.1@3664.52,2528 3665,2528.48 R33.1@3665,2587
NetLED6_1: LED6.1 R34.1 | length 64.8
  Top Layer w20: R34.1@4980,4975 4980,4976.81 LED6.1@5043,4976.81
NetLED7_1: LED7.1 R35.1 | length 53.1
  Top Layer w20: R35.1@5344.98,3400 5344.98,3401.81 5349.24,3406.06 5349.24,3450.3 LED7.1@5350,3451.06
NetLED8_1: LED8.1 R36.1 | length 144.6
  Top Layer w10: R36.1@5224,2473.5 5224,2471.69 5248.62,2447.06 5317.05,2447.06 LED8.1@5344.98,2475
NetLED9_1: LED9.1 R37.1 | length 66.2
  Top Layer w10: R37.1@4288.68,2594.62 LED9.1@4288.74,2528.48 LED9.1@4288.74,2528.48
NetLM1_3: LM1.3 R6.2 R7.1 | length 117.6
  Top Layer w10: R6.2@2895,3589 2895,3587 2899.39,3582.61 2970.11,3582.61 LM1.3@2972.72,3580 ; R6.2@2899.97,3587 R7.1@2899.97,3622
NetLM1_5: LM1.5 R9.2 R12.1 | length 116.2
  Top Layer w10: R9.2@2895,3474 R9.2@2896.81,3474 ; R9.2@2899.23,3474.73 R9.2@2903.5,3479 ; R12.1@2899.97,3440.9 R9.2@2899.97,3474 2903.36,3477.39 2970.11,3477.39 LM1.5@2972.72,3480
NetLM1_10: LM1.10 R8.2 R13.1 | length 103.5
  Top Layer w10: LM1.10@3187.28,3480 3189.89,3482.61 3246.73,3482.61 R8.2@3250,3485.87 R13.1@3250,3451.06 ; R8.2@3245.03,3487.87 R8.2@3247.53,3485.37
NetLM1_12: LM1.12 R4.2 R5.2 | length 120
  Top Layer w10: LM1.12@3187.28,3580 3207.7,3580 3212.76,3585.06 3233.19,3585.06 3248.19,3600.06 R5.2@3250,3600.06 ; R5.2@3245.03,3591 R5.2@3250.98,3596.94 ; R4.2@3250.98,3630.94 R5.2@3250.98,3596.94 ; R5.2@3252.2,3596 3250.98,3596 R5.2@3250.98,3596.94 ; R5.2@3254.09,3600.06 R5.2@3250.98,3596.94
NetLM2_3: LM2.3 R16.2 R17.1 | length 127.7
  Top Layer w10: R17.1@2895,3255 2895,3251.19 R17.1@2896.81,3251.19 ; R17.1@2899.97,3251.19 R16.2@2899.97,3218 2900.95,3217.02 2926.78,3217.02 2955.98,3187.81 LM2.3@2972.72,3187.81 LM2.3@2970.12,3190.41
NetLM2_5: LM2.5 R19.2 R20.1 | length 127
  Top Layer w10: R20.1@2899.23,3006.35 R19.2@2899.23,3040.16 2908.33,3040.16 2955.98,3087.81 LM2.5@2972.72,3087.81
NetLM2_10: LM2.10 R18.2 R21.1 | length 101.9
  Top Layer w10: LM2.10@3187.28,3087.81 3238.54,3087.81 3248.19,3078.16 R18.2@3250,3078.16 R21.1@3250,3043
NetLM2_12: LM2.12 R14.2 R15.2 | length 102.8
  Top Layer w10: LM2.12@3187.28,3187.81 3188.46,3188.98 3248.83,3188.98 R15.2@3250,3190.16 3250,3222 R14.2@3245.08,3226.92 ; R15.2@3245.03,3190.16 R15.2@3245.11,3190.24 ; R14.2@3245.03,3226.92 R14.2@3245.11,3227
NetQ1_2: Q1.2 R25.2 R26.2 | length 129.5
  Top Layer w10: R26.2@3472.7,3695 3472.7,3751.16 Q1.2@3471.26,3752.6 3472.24,3752.6 3502.65,3783 R25.2@3530,3783
NetR22_1: R22.1 TJA1.7 | length 80.6
  Top Layer w10: R22.1@4639,4075.2 4639,4073.39 4644.81,4067.58 4644.81,4049.41 4670,4024.22 TJA1.7@4670,4007.48
NetR23_1: R23.1 TJA1.6 | length 88.4
  Top Layer w10: TJA1.6@4720,4007.48 4720,4023.39 4770,4073.39 R23.1@4770,4075.2
NetR27_2: R27.2 RGB1.4 | length 85.2
  Top Layer w10: R27.2@3427.17,2970.55 3427.17,2913.31 3436.93,2903.54 RGB1.4@3451.07,2903.54
NetR28_1: R28.1 RGB1.2 | length 73
  Top Layer w10: R28.1@3305,2970 3305,2913.31 3314.76,2903.54 RGB1.2@3317.21,2903.54
NetR29_2: R29.2 RGB1.3 | length 78.4
  Top Layer w10: RGB1.3@3451.07,2846.46 3453.34,2848.73 3525.31,2848.73 R29.2@3527.58,2851
NRST: C6.1 KEY1.3 KEY1.4 R3.1 U1.25 | length 1460.3
  Top Layer w10: C6.1@2997,4215 3099.88,4215 ; R3.1@3120,4215 3099.88,4215 ; KEY1.4@3123.88,4144.37 3123.88,4170 3099.88,4194 3099.88,4215 ; KEY1.4@3143.58,4144.69 KEY1.3@3143.58,3855.32 3168.58,3830.32 3165,3826.73 v1(3165,3770) ; U1.25@3592.76,3227.05 v1(3655,3227.05)
  Bottom Layer w10: v1(3165,3770) 3264.15,3770 3659.76,3374.38 3659.76,3304.41 3655,3299.64 v1(3655,3227.05)
OSC_IN: C1.1 R1.2 U1.23 x1.1 | length 275.4
  Top Layer w10: x1.1@3380,3328.34 3389.83,3318.51 3457.4,3318.51 3458.4,3317.5 3460,3317.5 C1.1@3470,3307.5 C1.1@3470.07,3307.44 ; R1.2@3470.13,3270.5 3470.07,3270.57 C1.1@3470.07,3307.44 ; U1.23@3592.76,3266.42 3511.09,3266.42 C1.1@3470.07,3307.44
OSC_OUT: C2.1 R1.1 U1.24 x1.2 | length 271
  Top Layer w10: x1.2@3380,3195.5 C2.1@3470,3195.5 ; R1.1@3470.13,3232.5 3470.07,3232.44 3470.07,3195.57 C2.1@3470,3195.5 ; U1.24@3592.76,3246.73 3592.41,3246.39 3529.27,3246.39 3478.39,3195.5 C2.1@3470,3195.5
RES: P7.5 U1.132 | length 393.1
  Top Layer w10: U1.132@3906.73,3777.24 3906.73,3941.69 3937.51,3972.47 4062.47,3972.47 P7.5@4105,4015
RLED_1: R30.2 U1.1 | length 1793.6
  Top Layer w10: R30.2@2833,4965 2951.26,4965 3065,4851.26 3065,4750 3075,4740 v1(3085,4740) ; v1(3005,4405.03) 3005,4407.51 3135,4537.51 v1(3135,4540) ; v1(3535,3705) 3537.62,3705 3543.13,3699.49 U1.1@3592.76,3699.49
  Bottom Layer w10: v1(3005,4405.03) 3005,4320.02 3535,3790.01 v1(3535,3705) ; v1(3085,4740) 3085,4590 v1(3135,4540)
RLED_2: R31.2 U1.2 | length 1058.5
  Top Layer w10: R31.2@2878,3945 v1(2915,3945) ; v1(3518,3679.8) U1.2@3592.76,3679.8
  Bottom Layer w10: v1(2915,3945) 2875,3985 2875,4066.98 2880.86,4072.84 3037.67,4072.84 3430.71,3679.8 v1(3518,3679.8)
RLED_3: R32.2 U1.3 | length 1885.1
  Top Layer w10: R32.2@2765,2561 2813.38,2561 v1@2817.38,2565 ; v1(2970,2700) 3250.4,2700 3340.44,2790.04 3506.82,2790.04 3595,2878.22 v1(3595,2905) ; U1.3@3592.76,3660.12 3592.93,3659.94 3654.83,3659.94 v1(3655,3659.77)
  Bottom Layer w10: v1(2815,2570) 2945,2700 v1(2970,2700) ; v1(3595,2905) 3595,2940 3650,2995 3650,3045 3720.86,3115.86 3720.86,3486.45 3655,3552.3 v1(3655,3659.77)
RLED_4: R33.2 U1.4 | length 1214.4
  Top Layer w10: U1.4@3592.76,3640.43 3593.1,3640.09 3622.79,3640.09 3800,3462.88 v1(3800,3157) ; R33.2@3665,2625 3667.62,2627.62 v1(3667.62,2652.62)
  Bottom Layer w10: v1(3667.62,2652.62) 3735.61,2652.62 3800,2717.01 v1(3800,3157)
SPI1_MISO: P16.3 U1.42 | length 686.7
  Top Layer w10: P16.3@3301,2565 3379,2643 3592.54,2643 3768.59,2819.05 3768.59,2932.41 U1.42@3768.94,2932.76
SPI1_MOSI: P16.2 U1.43 | length 609.7
  Top Layer w10: P16.2@3401,2565 3461,2625 3600,2625 3788.28,2813.28 3788.28,2932.41 U1.43@3788.62,2932.76
SPI1_NSS: P16.5 U1.40 | length 835.5
  Top Layer w10: P16.5@3101,2565 3105.67,2569.67 3145.53,2569.67 3265.86,2690 3580,2690 3729.57,2839.57 U1.40@3729.57,2932.76
SPI1_SCK: P16.4 U1.41 | length 763.6
  Top Layer w10: P16.4@3201,2565 3297,2661 3585.09,2661 3748.91,2824.82 3748.91,2932.41 U1.41@3749.25,2932.76
SPI2_MISO: P17.7 U1.75 | length 724.6
  Top Layer w10: U1.75@4437.24,3049.88 4437.59,3049.54 4473.05,3049.54 4802.53,2720.06 4802.53,2597.38 4764.67,2559.53 4764.67,2519.67 P17.7@4760,2515
SPI2_MOSI: P17.6 U1.76 | length 1044
  Top Layer w10: U1.76@4435.43,3069.22 4478.82,3069.22 4820.53,2727.51 4820.53,2491.39 4779.14,2450 4764.86,2450 4717.47,2497.38 4717.47,2557.53 P17.6@4660,2615
SPI2_SCK: P17.5 U1.74 | length 618.7
  Top Layer w10: U1.74@4455,3029.42 4455.43,3029.85 4467.28,3029.85 4631.43,2865.7 4631.43,2646.57 4617.47,2632.62 4617.47,2597.38 4655.33,2559.53 4655.33,2519.67 P17.5@4660,2515
SPI3_CLK: P7.3 U1.133 | length 258.9
  Top Layer w10: U1.133@3887.05,3777.24 3887.05,3823.54 3870.47,3840.12 3870.47,3980.47 P7.3@3905,4015
SPI3_MOSI: P7.4 U1.135 | length 432
  Top Layer w10: U1.135@3847.68,3777.24 3847.68,4017.82 3887.38,4057.53 3922.62,4057.53 3960.47,4019.67 4000.33,4019.67 P7.4@4005,4015
SWCLK: P5.1 U1.109 | length 1190
  Top Layer w10: U1.109@4359.49,3799.49 U1.109@4359.49,3777.24 4360,3776.73 v1(4360,3835) ; P5.1@4509.21,4815 4509.21,4793.35 4590,4712.56 v1(4590,4675)
  Bottom Layer w10: v1(4360,3835) 4360,3964.54 4590,4194.54 v1(4590,4675)
SWDIO: P5.2 U1.105 | length 1485.5
  Top Layer w10: v1(4385.43,3640.43) U1.105@4437.24,3640.43 U1.105@4437.59,3640.78 ; v1(4460,4690) P5.2@4460,4815 P5.2@4460,4836.65
  Bottom Layer w10: v1(4385.43,3640.43) 4359.57,3640.43 4250,3750 4337.16,3837.16 4337.16,3967.16 4555,4185 4555,4590 4460,4685 v1(4460,4690)
TIM3_CH1: P2.5 U1.96 | length 451.5
  Top Layer w10: U1.96@4437.24,3463.27 4826.73,3463.27 4860,3430 P2.5@4860,3415
TIM3_CH2: P2.6 U1.97 | length 436
  Top Layer w10: U1.97@4437.24,3482.95 4827.95,3482.95 4847.5,3502.5 P2.6@4860,3515
TIM3_CH3: P2.7 U1.98 | length 469.3
  Top Layer w10: U1.98@4437.24,3502.64 4747.64,3502.64 4847.5,3602.5 P2.7@4860,3615
TIM3_CH4: P2.8 U1.99 | length 502.6
  Top Layer w10: U1.99@4437.24,3522.32 4667.32,3522.32 4847.5,3702.5 P2.8@4860,3715
TIM4_CH1: P2.1 U1.81 | length 488.3
  Top Layer w10: U1.81@4437.24,3167.99 4467.01,3167.99 4505,3130 4655,3130 4772.57,3012.43 4812.43,3012.43 4815,3015 P2.1@4860,3015
TIM4_CH2: P2.2 U1.82 | length 460.4
  Top Layer w10: U1.82@4430.78,3187.68 U1.82@4437.24,3187.68 U1.82@4450.78,3187.68 ; U1.82@4450,3188.46 U1.82@4450.78,3187.68 ; P2.2@4860,3115 4695.46,3115 4662.46,3148 4512.46,3148 4472.78,3187.68 U1.82@4450.78,3187.68
TIM4_CH3: P2.3 U1.85 | length 435.9
  Top Layer w10: U1.85@4437.24,3246.73 4828.27,3246.73 P2.3@4860,3215
TIM4_CH4: P2.4 U1.86 | length 451.7
  Top Layer w10: U1.86@4437.24,3266.42 4826.42,3266.42 4860,3300 P2.4@4860,3315
TIM5_CH1_B: R28.2 U1.34 | length 282.8
  Top Layer w10: R28.2@3343,2970 3418,3045 3549.65,3045 3554.19,3049.54 3592.41,3049.54 U1.34@3592.76,3049.88
TIM5_CH2_G: R27.1 U1.35 | length 152.3
  Top Layer w10: R27.1@3465.17,2970.55 3521.62,3027 3557.11,3027 3559.96,3029.85 3592.41,3029.85 U1.35@3592.76,3030.2
TIM5_CH3_R: R29.1 U1.36 | length 170.3
  Top Layer w10: R29.1@3527.58,2889 3527.58,2982.58 3554,3009 3564.56,3009 3565.73,3010.17 3592.41,3010.17 U1.36@3592.76,3010.51
UART4_RX: P9.2 U1.112 | length 1043.6
  Top Layer w10: U1.112@4300.43,3777.24 4300.78,3777.59 4300.78,3839.61 4380.45,3919.28 5060.34,3919.28 5178.35,4037.28 P9.2@5200,4037.28
UART4_TX: P9.3 U1.111 | length 1248.7
  Top Layer w10: U1.111@4320.12,3777.24 U1.111@4320.12,3777.37 ; U1.111@4320.9,3777.37 4320.9,3746.78 4320.46,3747.21 4320.46,3777.02 U1.111@4320.12,3777.37 ; P9.3@5200,4086.5 5206.81,4079.68 5228.69,4079.68 5246.46,4061.91 5246.46,3970.88 5176.87,3901.28 4387.9,3901.28 4320.12,3833.49 U1.111@4320.12,3777.37